# Altium PCB Double PCB.PcbDoc
Units mm, origin at the board's own origin, x right, y up, seen from the top; angles counter-clockwise.
Board outline 77.98 x 79.63 mm, 2 copper layers (Top Layer, Bottom Layer); 17 components, 18 nets, 87 pads, 35 vias.
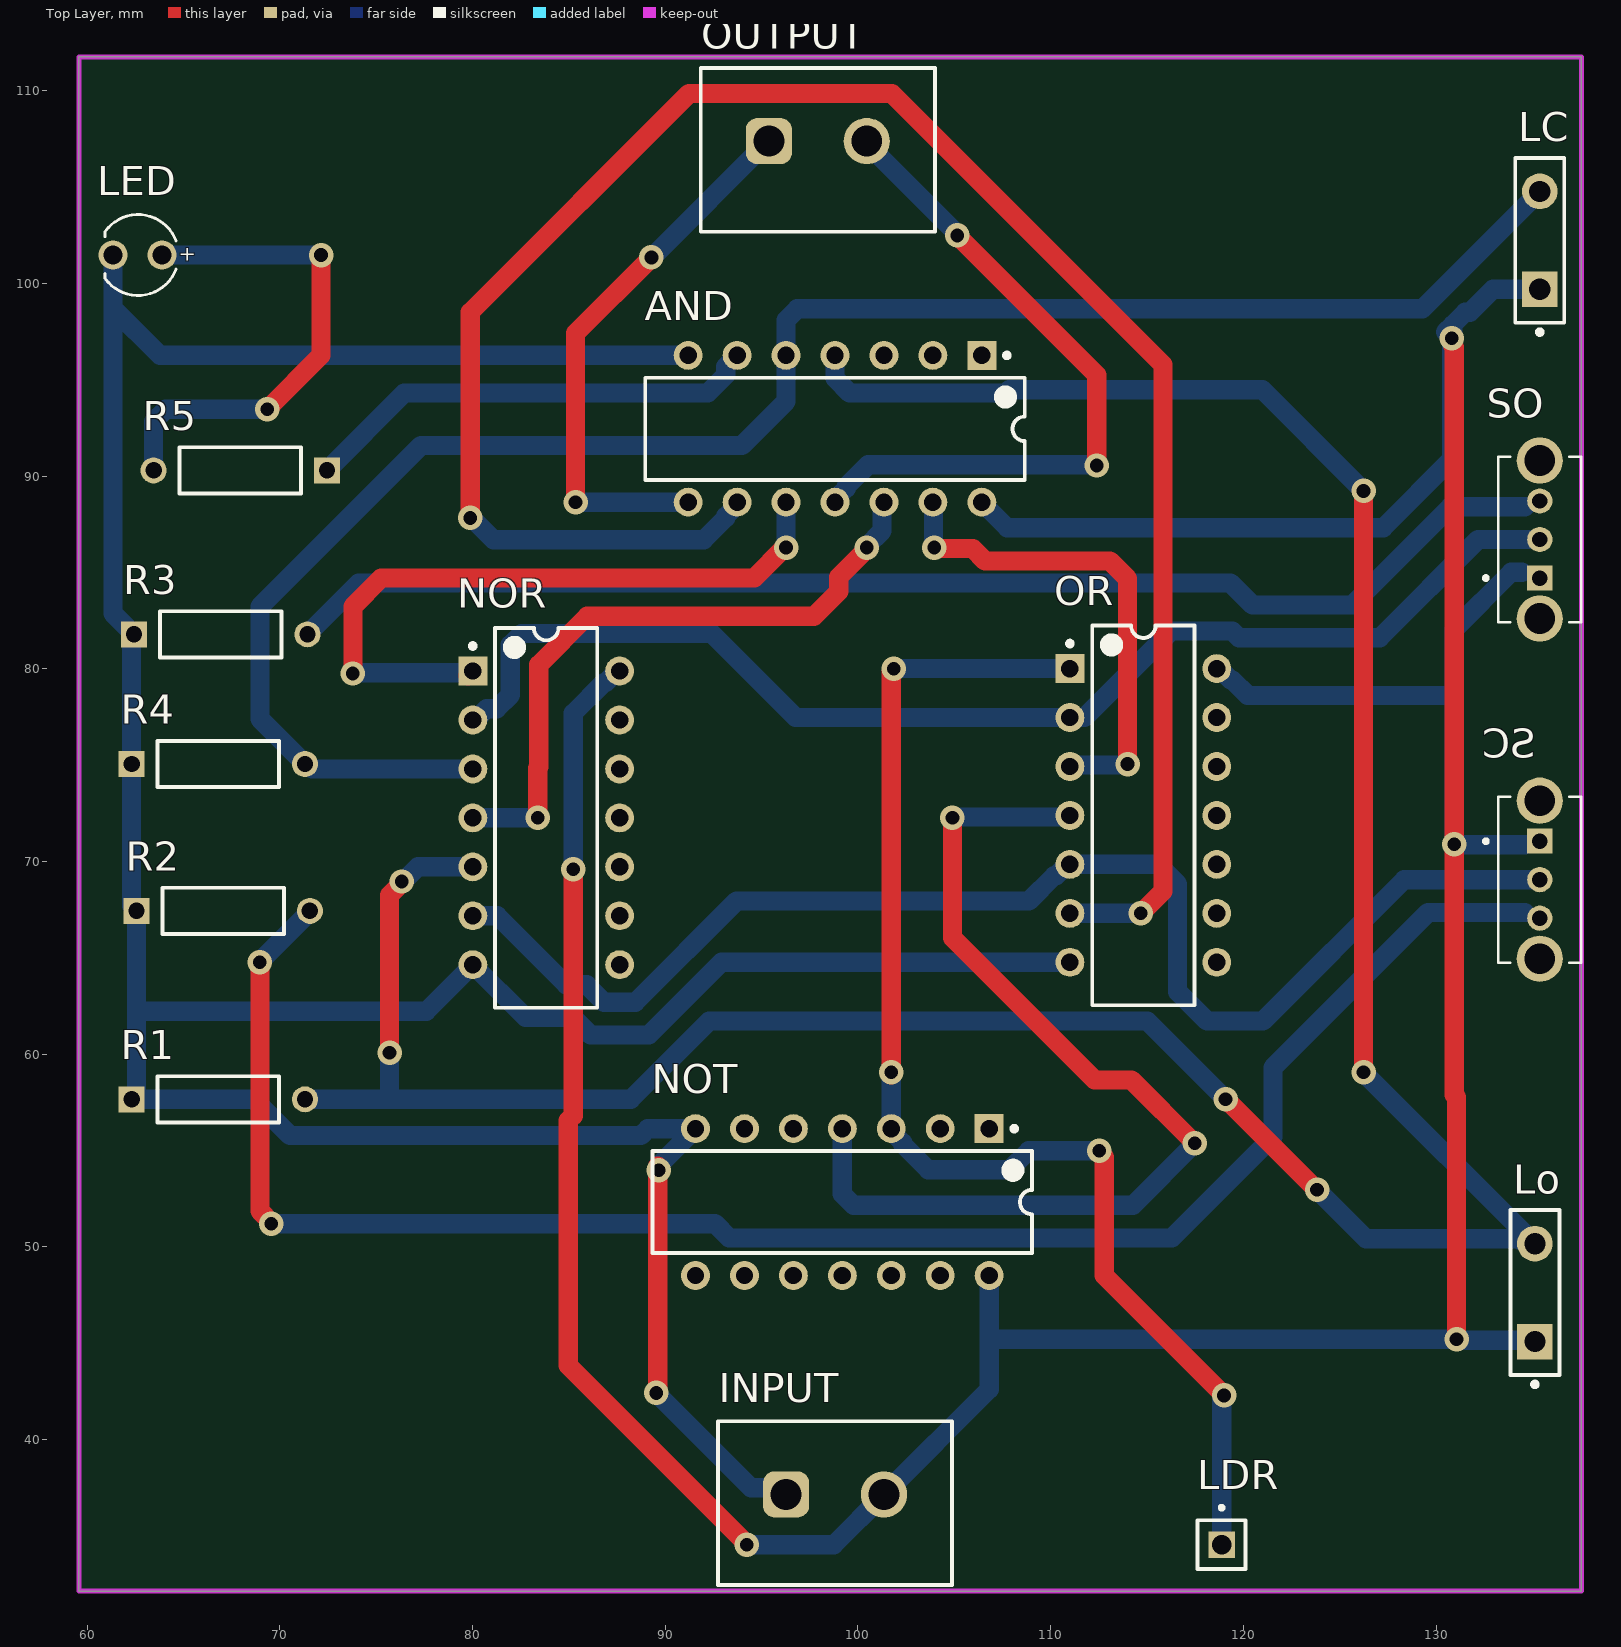
[diagram p0: Top Layer view]
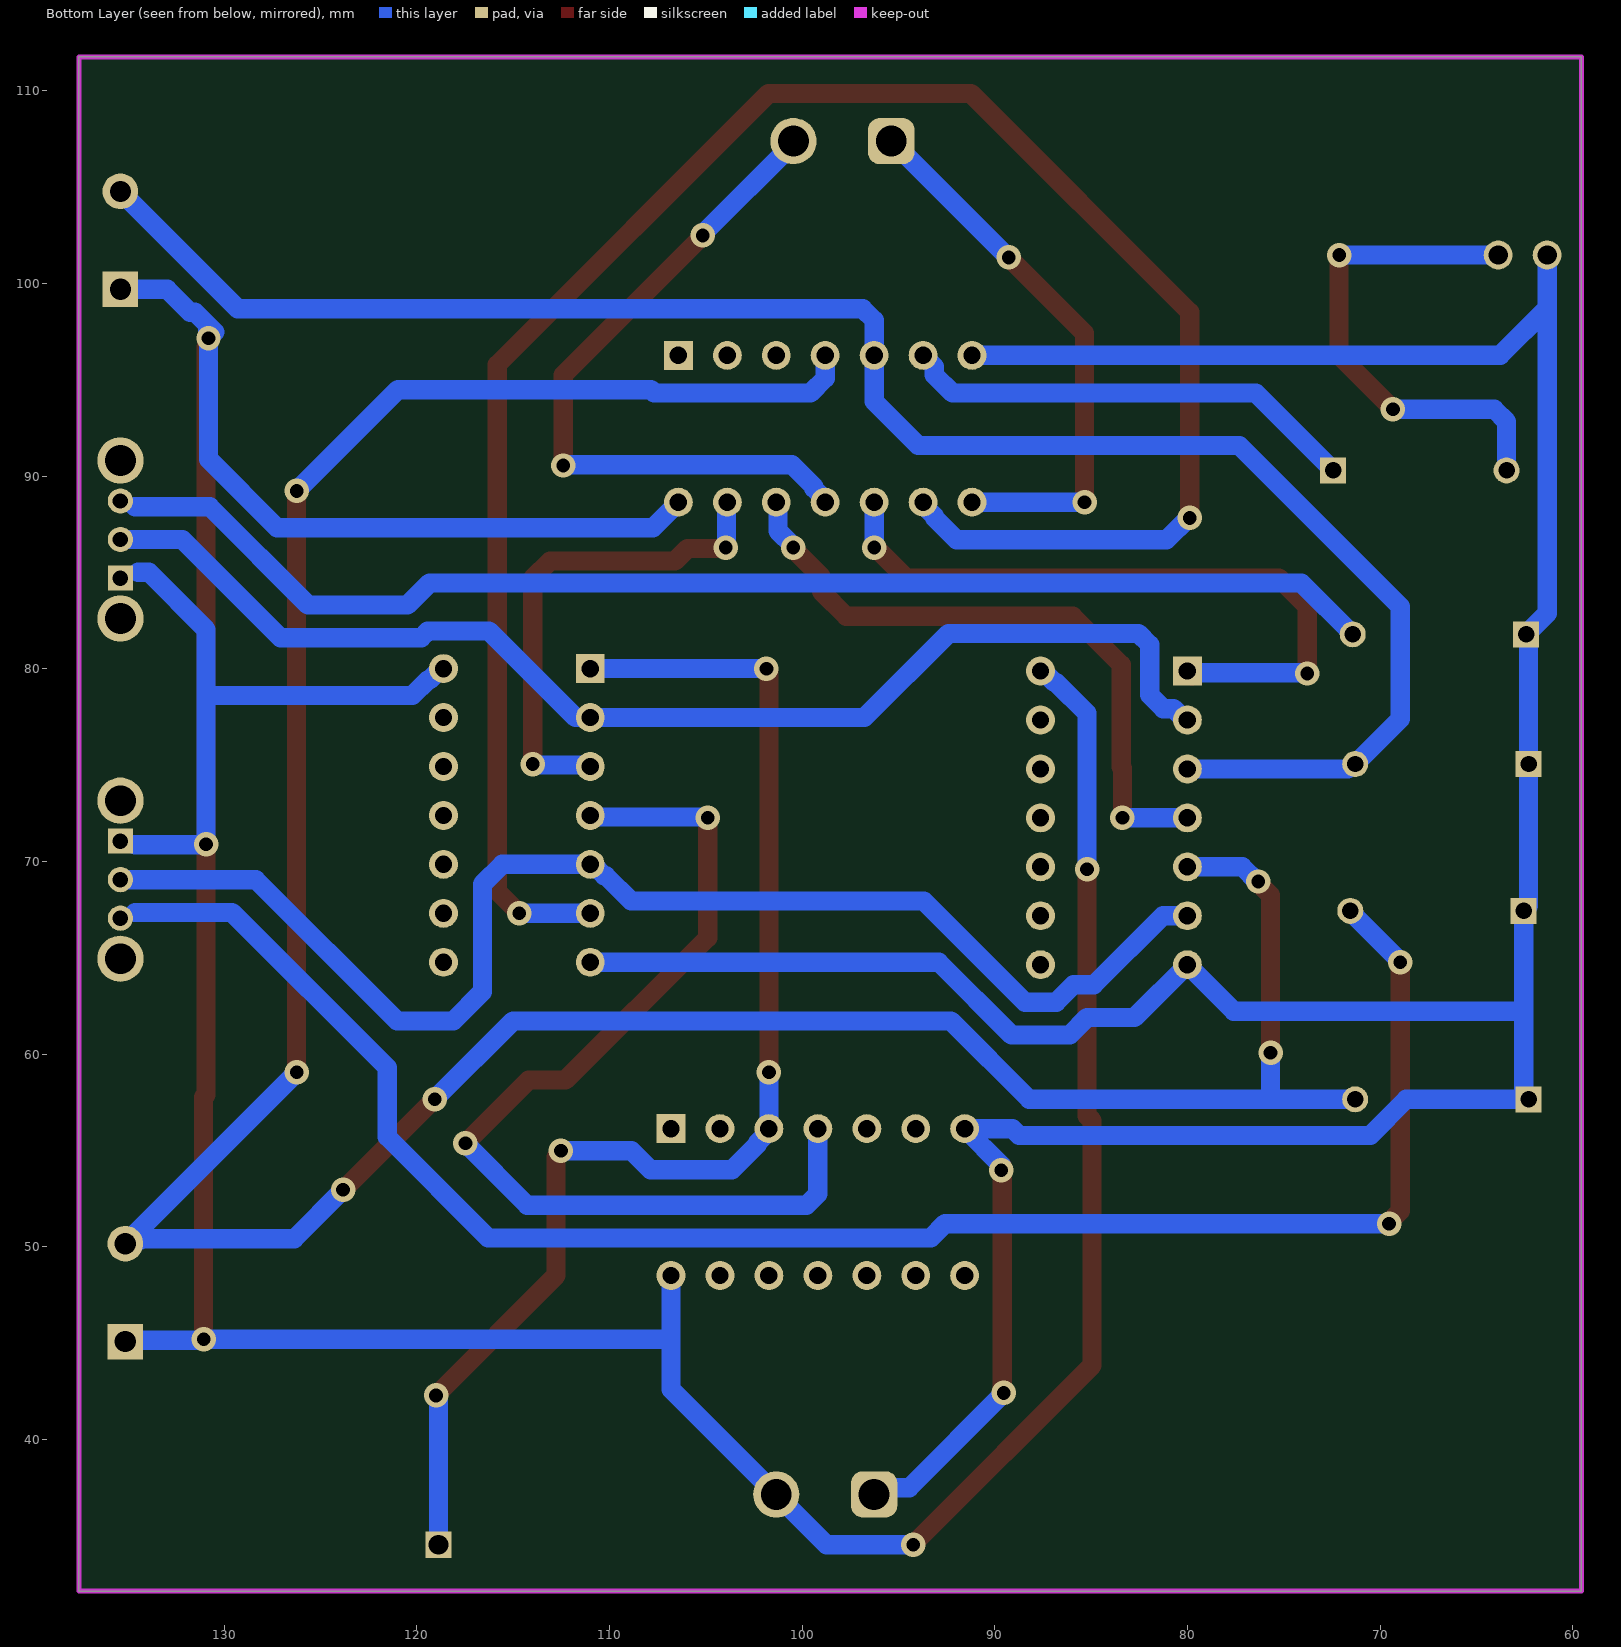
[diagram p1: Bottom Layer view, seen from below]

## Layer stack, top to bottom
Top Solder: solder mask 0.0102, Solder Resist, Dk 3.5
Top Layer: signal copper 0.0356
Dielectric 1: dielectric 0.32, FR-4, Dk 4.8
Bottom Layer: signal copper 0.0356
Bottom Solder: solder mask 0.0102, Solder Resist, Dk 3.5

## Board outline
59.563,32.131 59.563,111.76 137.541,111.76 137.541,32.131

## Design rules (kind name [scope] priority, off if disabled: settings)
Clearance [All] p1: gap=0.7 ignorepadtopadclearanceinfootprint=FALSE
PolygonConnect [All] p1: connectstyle=Relief reliefconductorwidth=0.254 reliefentries=4 polygonreliefangle="90 Angle" airgapwidth=0.254
RoomDefinition Sheet2 [InComponentClass('Sheet2')] p1: confinementstyle=ConfineIn formatcopy=TRUE lockcomponents=FALSE outline 0,0 50.8,0 50.8,25.4 0,25.4
RoutingVias [All] p1: holewidth=0.711 width=1.27 viastyle="Through Hole" minholewidth=0.711 minwidth=1.27 maxholewidth=0.711 maxwidth=1.27
SolderMaskExpansion [All] p1: expansion=0.102 istentingtop=FALSE
Width [All] p1: maxlimit=1 minlimit=0.254 preferedwidth=1
30 further rules are at their usual default settings.

## Components (designator, comment, footprint, x,y, rotation, side; value= is the part's Value field where it differs from the comment)
AND "SN74LS08N" N0014A 98.806,92.456 r270 top
INPUT "" 691311500102 98.806,36.703 r0 top
LC "SW-PB" SPST-2 135.382,102.235 r90 top
LDR "" SAMTEC_HTSW-101-06-T-S 118.872,34.544 r90 top
LED "151031YS05900" WL-TMRC_D3.95H5.3 -1207.389,-1168.527 r180 top
Lo "SW-PB" SPST-2 135.128,47.625 r90 top
NOR "" N0014A 83.82,72.263 r0 top
NOT "SN7404N" N0014A 99.187,52.324 r270 top
OR "" N0014A 114.808,72.39 r0 top
OUTPUT "691311500102" 691311500102 97.917,106.934 r0 top
R1 "" RESA60-630X240 66.802,57.658 r0 top
R2 "" RESA60-630X240 67.056,67.437 r0 top
R3 "" RESA60-630X240 66.929,81.788 r0 top
R4 "" RESA60-630X240 66.802,75.057 r0 top
R5 "MFR-25FBF52-47R5" RESA60-630X240 67.945,90.297 r180 top
SC "EG1247" SW_EG1247 135.382,69.056 r270 top
SO "EG1247" SW_EG1247 135.382,86.709 r90 top

## Footprints (in the part's own frame and the unit in brackets; to place one, negate y for a bottom-side part, rotate by r counter-clockwise, add the part's x,y. Pads: shape width x height; smd on the part's side, far side on the other; paste and mask are expansions set on the pad)
691311500102 [mm] "5,08mm - PCB Headers - Vertical - Closed ends -02p"
  rrect50% 2.4x2.4 hole 1.6: 1(-2.54,0.45)
  round 2.4 hole 1.6: 2(2.54,0.45)
  silkscreen extent -6.08,-4.25 6.08,4.25, body extent -6.08,-4.25 6.08,4.25, height 12.05
N0014A [mm] "DIP, 14-Leads, Body 19.7x6.6mm, Pitch 2.54mm"
  rect 1.5x1.5 hole 0.9: 1(-3.81,7.62)
  round 1.5 hole 0.9: 2(-3.81,5.08) 3(-3.81,2.54) 4(-3.81,0) 5(-3.81,-2.54) 6(-3.81,-5.08) 7(-3.81,-7.62) 8(3.81,-7.62) 9(3.81,-5.08) 10(3.81,-2.54) 11(3.81,0) 12(3.81,2.54) 13(3.81,5.08) 14(3.81,7.62)
  silkscreen extent -3.93,-9.85 2.65,9.85, body extent -3.95,-9.85 3.95,9.85, height 5.08
RESA60-630X240 [mm] "Axial Resistor, 2-Leads, Dia 2.4mm, Body Length 6.3mm"
  rect 1.35x1.35 hole 0.85: 1(-4.5,0)
  round 1.35 hole 0.85: 2(4.5,0)
  silkscreen extent -3.15,-1.2 3.15,1.2, body extent -3.15,-1.2 3.15,1.2, height 2.4
SAMTEC_HTSW-101-06-T-S [mm]
  rect 1.37x1.37 / inner round 1.37 / far side rect 1.37x1.37 hole 1.02: 01(0,0)
  silkscreen extent -1.27,-1.24 2.02,1.24
SPST-2 [mm] "Switch; 2 Leads"
  rect 1.85x1.85 hole 1.1: 1(-2.54,0)
  round 1.85 hole 1.1: 2(2.54,0)
  silkscreen extent -4.89,-1.27 4.28,1.27
SW_EG1247 [mm]
  rect 1.308x1.308 / inner round 1.308 / far side rect 1.308x1.308 hole 0.8: 1(-2,0)
  round 1.308 hole 0.8: 2(0,0) 3(2,0)
  round 2.4 hole 1.6: SH1(-4.1,0) SH2(4.1,0)
  silkscreen extent -4.3,-2.9 4.3,2.15, body extent -4.3,-2.15 4.3,6.15, height 2.8
WL-TMRC_D3.95H5.3 [mm] "THT Mono-color Round Color LED, 2-leads"
  round 1.5 hole 1: 1(-1271.27,-1270) 2(-1268.73,-1270)
  silkscreen extent -1272,-1272.1 -1268.31,-1267.9, body extent -1271.99,-1271.97 -1268.37,-1268.03, height 5.35

## Part data
AND: library part CMP-0777-00259-3, "Quadruple 2-Input Positive-AND Gates, N0014A, TUBE", F @ Nom Voltage(Max)(Mhz)=35, Generic Part Number=SN74LS08, ICC @ Nom Voltage(Max)(mA)=0.021, Manufacturer="Texas Instruments", Operating Temperature Range(C)="0 to 70", Rating=Catalog, tpd @ Nom Voltage(Max)(ns)=25, Voltage(Nom)(V)=5, Bits(#)=4, DatasheetVersion=SDLS033, Input Type=TTL, Output Drive (IOL/IOH)(Max)(mA)=-0.8/16, Output Type=TTL, PackageReference=N0014A, Schmitt Trigger=No, Technology Family=LS, VCC(Max)(V)=5.25, VCC(Min)(V)=4.75
INPUT OUTPUT: library part CMP-1502-02146-2, Color=Green, Current=20A, Max Operating Temperature=105°C, Min Operating Temperature=-40°C, Voltage=300V, Contact Material=Brass, Contact Plating=Tin, Current Rating=20A, Gender=Male, Height=12mm, Lead Pitch=5.08mm, Length=8.5mm, Mount="Through Hole", NexarPartId=8917747, Number of Contacts=2, Number of Levels=1, Number of Pins=2, Number of Positions Per Level=2, Number of Rows=1, Orientation=Vertical, Packaging=Box, Pitch=5.08mm, REACH SVHC=Unknown, RoHS=Compliant, Termination=Solder, Voltage Rating=300V, Width=11.5mm
LC Lo: "Switch", LatestRevisionDate=17-Jul-2002, LatestRevisionNote="Re-released for DXP Platform.", PackageDescription="Switch; 2 Leads", PackageReference=SPST-2, Published=24-Mar-1999, Publisher="Altium Limited"
LDR: library part HTSW-101-06-T-S, Package=None, Availability=Unavailable, MP=HTSW-101-06-T-S, Price=None
LED: library part CMP-1488-00003-2, Case/Package=Radial, Color=Yellow, Forward Current=100mA, Forward Voltage=2.1V, Max Operating Temperature=85°C, Max Reverse Voltage (DC)=5V, Min Operating Temperature=-40°C, Test Current=20mA, Dominant Wavelength=590nm, Height=5.3mm, Length=3mm, Lens Size=3mm, Lens Style="Circular, Diffused, Round", Luminous Intensity=30mcd, Mount="Through Hole", NexarPartId=29717806, Packaging=Bulk, Peak Wavelength=585nm, REACH SVHC=Unknown, RoHS=Compliant, Viewing Angle=60°, Wavelength=585nm, Width=3mm
NOR: library part CMP-0806-00203-3, "Quad 2-input Positive-NOR gates, N0014A, TUBE", F @ Nom Voltage(Max)(Mhz)=75, Generic Part Number=SN7402, ICC @ Nom Voltage(Max)(mA)=0.027, Manufacturer="Texas Instruments", Operating Temperature Range(C)="0 to 70", Rating=Catalog, tpd @ Nom Voltage(Max)(ns)=22, Voltage(Nom)(V)=5, Bits(#)=4, Code_JEDEC=MS-001, DatasheetVersion=SDLS027, Input Type=TTL, Output Drive (IOL/IOH)(Max)(mA)=0.8/-16, Output Type=TTL, PackageReference=N0014A, PackageVersion=http://www.ti.com/lit/ml/mpdi002c/mpdi002c.pdf, VCC(Max)(V)=5.25, VCC(Min)(V)=4.75
NOT: library part CMP-1615-00872-2, "Hex inverters, N0014A, TUBE", F @ Nom Voltage(Max)(Mhz)=35, Generic Part Number=SN7404, ICC @ Nom Voltage(Max)(mA)=0.033, Manufacturer="Texas Instruments", Operating Temperature Range(C)="0 to 70", Rating=Catalog, tpd @ Nom Voltage(Max)(ns)=22, Voltage(Nom)(V)=5, Bits(#)=6, Code_JEDEC=MS-001, DatasheetVersion=SDLS029C, Input Type=TTL, Output Drive (IOL/IOH)(Max)(mA)=-0.4/16, Output Type=CMOS, PackageReference=N0014A, Schmitt Trigger=No, Technology Family=TTL, VCC(Max)(V)=5.25, VCC(Min)(V)=4.75
OR: library part CMP-1573-00140-3, "Quad 2-input positive-OR gates, N0014A, TUBE", F @ Nom Voltage(Max)(Mhz)=100, Generic Part Number=SN7432, ICC @ Nom Voltage(Max)(mA)=0.038, Manufacturer="Texas Instruments", Operating Temperature Range(C)="0 to 70", Rating=Catalog, tpd @ Nom Voltage(Max)(ns)=22, Voltage(Nom)(V)=5, Bits(#)=4, Code_JEDEC=MS-001, DatasheetVersion=SDLS100, Input Type=TTL, Output Drive (IOL/IOH)(Max)(mA)=0.8/-16, Output Type=TTL, PackageReference=N0014A, PackageVersion=http://www.ti.com/lit/ml/mpdi002c/mpdi002c.pdf, VCC(Max)(V)=5.25, VCC(Min)(V)=4.75
R1 R2 R3 R4 R5: library part CMP-1659-00067-1, "Axial Resistor, 47.5 Ohm, +/- 1%, 0.25 W, -55 to 155 degC, 2-Pin THD, RoHS, Bulk", Case\Package=SOIC, Max Operating Temperature="85 degC", Max Supply Voltage="5 V", Min Operating Temperature="-40 degC", Min Supply Voltage="3 V", Nominal Supply Current="170 uA", Nominal Voltage Gain="100 dB", Output Current="160 mA", Package Quantity=2500, Bandwidth="1 MHz", Channels=4, Common Mode Rejection Ratio="50 dB", ComponentLink1Description="Manufacturer URL", ComponentLink1URL=http://www.yageo.com/, ComponentLink2Description=Datasheet, ComponentLink2URL=http://www.yageo.com/documents/recent/Yageo%20LR_MFR_2013.pdf, DatasheetVersion=Apr-13, Height="1.58 mm", Length="8.65 mm", Mount="Surface Mount", Nominal Gain Bandwith Product="1 MHz", PackageDescription="2-Pin Axial Lead, Dia 2.4 mm, Body Length 6.3 mm", PackageReference=MFR-25, Packaging="Tape and Reel", Pins=14, Radiation Hardening=No, REACH SVHC="No SVHC", RoHSCompliant=true, Slew Rate="1 V\us", Unity Gain Bandwidth Product="1 MHz", Width="3.91 mm"
SC SO: "Slide Switch SPDT Through Hole, Right Angle", Package=None, Availability="In Stock", Check_prices=https://www.snapeda.com/parts/EG1247/E-Switch/view-part/?ref=eda, MF=E-Switch, MP=EG1247, Price=None, Purchase-URL=https://pricing.snapeda.com/search/part/EG1247/?ref=eda, SnapEDA_Link=https://www.snapeda.com/parts/EG1247/E-Switch/view-part/?ref=snap

## Via types
v1: diameter 1.27, hole 0.711, Top Layer to Bottom Layer, 35 vias

## Nets (pads, with @x,y where several pads share a name; then routed paths per layer and width w, separated by ;. In a path a pad name is that pad's centre, name@x,y a point inside that pad or via, vN(x,y) a via of type N, cw(c..) or ccw(c..) an arc to the next point about the centre after c; other vN are vias at no path point)
GND: AND.7 INPUT.1 LED.2 NOR.7 NOT.7 OR.7 R1.1 R2.1 R3.1 R4.1 | length 181.8
  Top Layer w1: R1.1 R1.1@62.429,57.785 ; R4.1@62.31,75.065 R4.1 R4.1@62.38,74.979 ; v1@89.611,42.374 v1@89.611,54.178
  Bottom Layer w1: LED.2 61.341,98.704 ; v1(89.535,42.418) 94.448,37.505 95.914,37.505 INPUT.1 ; v1@89.662,54.229 NOT.7 89.091,56.134 88.74,55.783 70.525,55.783 68.65,57.658 R1.1 62.556,57.912 62.556,62.539 ; AND.7 63.779,96.266 61.341,98.704 ; OR.7 92.919,64.77 89.142,60.993 86.118,60.993 85.213,61.898 82.755,61.898 NOR.7 77.597,62.23 62.865,62.23 62.556,62.539 ; 61.341,98.704 61.341,82.876 62.302,81.915 R4.1 62.302,67.691 R2.1 62.556,62.539
  other v1: 89.662,53.975
NetAND_4: AND.4 Lo.2 NOR.5 R1.2 | length 159.7
  Top Layer w1: R1.2 R1.2@71.302,57.753 ; v1(75.692,60.071) 75.692,68.253 76.327,68.888 v1(76.327,68.961) ; v1(119.075,57.658) 119.101,57.658 123.8,52.959 v1(123.825,52.959) ; v1(126.238,59.055) v1(126.238,89.23)
  Bottom Layer w1: R1.2 75.692,57.658 ; v1(75.692,60.071) 75.692,57.658 ; v1(76.327,68.961) 76.4,68.961 77.162,69.723 NOR.5 ; AND.4 98.806,95.074 99.564,94.316 107.673,94.316 107.845,94.488 120.98,94.488 v1(126.238,89.23) ; v1(119.075,57.658) 115.011,61.722 92.275,61.722 88.211,57.658 75.692,57.658 ; v1(123.825,52.959) 126.365,50.419 134.273,50.419 134.364,50.328 Lo.2@134.965,50.328 ; v1(126.238,59.055) Lo.2@134.965,50.328 ; Lo.2 Lo.2@134.965,50.328
NetAND_5: AND.5 LC.2 NOR.3 R4.2 | length 95.3
  Bottom Layer w1: R4.2 68.961,77.398 68.961,83.236 77.318,91.592 93.98,91.592 96.266,93.878 96.266,98.093 96.852,98.679 129.286,98.679 LC.2 ; R4.2@71.683,74.803 NOR.3
NetAND_6: AND.6 R5.1 | length 24
  Bottom Layer w1: R5.1 76.458,94.31 92.202,94.31 93.142,95.25 93.142,95.682 AND.6
NetAND_8: AND.8 OUTPUT.1 | length 28.9
  Top Layer w1: v1(85.344,88.646) 85.344,97.409 v1(89.281,101.346) ; AND.8@91.051,88.646 AND.8
  Bottom Layer w1: v1(85.344,88.646) AND.8 ; v1(89.281,101.346) 89.31,101.346 95.348,107.384 OUTPUT.1
NetAND_9: AND.9 OR.6 | length 105.3
  Top Layer w1: v1(79.883,87.829) 79.883,98.501 91.237,109.855 101.752,109.855 115.824,95.783 115.824,68.453 v1(114.681,67.31) ; AND.9@93.643,88.563 AND.9 ; OR.6 OR.6@111.133,67.31
  Bottom Layer w1: v1(79.883,87.829) 79.956,87.829 81.089,86.696 91.994,86.696 93.136,87.838 93.136,87.921 93.726,88.511 AND.9 ; OR.6 v1(114.681,67.31)
NetAND_10: AND.10 NOR.1 | length 36.2
  Top Layer w1: v1(73.787,79.756) 73.787,83.234 75.262,84.709 94.612,84.709 96.193,86.29 v1(96.266,86.29) ; NOR.1@79.76,79.633 NOR.1
  Bottom Layer w1: v1(73.787,79.756) 73.824,79.793 79.92,79.793 NOR.1 ; v1(96.266,86.29) AND.10
NetAND_11: AND.11 OUTPUT.2 | length 36.5
  Top Layer w1: AND.11 AND.11@98.889,88.729 ; v1@105.244,102.577 105.244,102.401 112.395,95.25 v1(112.395,90.551)
  Bottom Layer w1: AND.11 98.806,88.781 99.396,89.371 99.396,89.454 100.538,90.596 112.35,90.596 v1(112.395,90.551) ; OUTPUT.2 100.457,107.261 105.156,102.562 v1(105.156,102.489)
NetAND_12: AND.12 NOR.4 | length 34.2
  Top Layer w1: NOR.4 NOR.4@80.145,72.263 ; v1(83.382,72.263) 83.382,74.841 83.439,74.898 83.439,80.213 85.954,82.728 97.714,82.728 99.003,84.017 99.003,84.763 100.457,86.217 v1(100.457,86.29)
  Bottom Layer w1: NOR.4 v1(83.382,72.263) ; v1(100.457,86.29) 100.457,86.363 101.25,87.156 101.25,88.55 AND.12
NetAND_13: AND.13 OR.3 | length 25.9
  Top Layer w1: v1(103.961,86.29) 104.013,86.238 105.956,86.238 106.596,85.598 113.079,85.598 113.989,84.688 v1(113.989,75.057) ; OR.3 OR.3@111.133,74.93
  Bottom Layer w1: AND.13 103.924,88.608 103.924,86.328 v1(103.961,86.29) ; OR.3 111.073,75.005 113.937,75.005 v1(113.989,75.057)
NetAND_14: AND.14 INPUT.2 LC.1 Lo.1 NOR.14 NOT.14 OR.14 SC.1 SO.1 | length 225.1
  Top Layer w1: v1(85.217,69.596) 85.217,56.809 84.963,56.555 84.963,43.84 v1@94.132,34.671 ; NOR.14@87.495,79.883 NOR.14 ; v1(130.81,97.155) 130.862,97.103 130.862,96.776 130.937,96.701 v1(130.937,70.891) 130.937,57.899 131.064,57.772 v1(131.064,45.212) ; LC.1@134.957,99.27 LC.1
  Bottom Layer w1: v1(85.217,69.596) 85.217,77.688 86.822,79.293 86.905,79.293 87.495,79.883 NOR.14 ; v1(94.234,34.544) 98.737,34.544 INPUT.2 106.807,42.614 106.807,45.212 ; AND.14 107.747,87.325 127.254,87.325 130.81,90.881 v1(130.81,97.155) ; NOT.14 106.807,45.212 ; OR.14 118.753,80.01 119.343,79.42 119.426,79.42 120.233,78.613 130.859,78.613 130.937,78.691 ; v1@130.488,97.477 130.862,97.85 ; v1@130.722,97.243 v1(130.81,97.155) ; 134.46,85.009 133.904,85.009 130.937,82.042 130.937,78.691 ; 134.62,70.866 130.962,70.866 v1(130.937,70.891) 130.937,78.691 ; Lo.1 135.053,45.16 131.116,45.16 v1(131.064,45.212) 106.807,45.212 ; LC.1 132.957,99.695 131.765,98.503 131.514,98.503 130.862,97.85 ; v1(130.81,97.155) 130.862,97.207 130.862,97.85
NetLDR_01: LDR.01 NOT.3 OR.1 | length 68.5
  Top Layer w1: v1@101.727,58.928 v1(101.727,59.055) 101.727,79.81 101.854,79.937 v1(101.854,80.01) ; v1(112.522,54.991) 112.522,54.918 112.776,54.664 112.776,48.514 118.911,42.379 v1@118.911,42.353
  Bottom Layer w1: v1(101.727,59.055) 101.727,55.999 102.317,55.409 102.317,55.326 103.644,53.999 107.869,53.999 108.861,54.991 v1(112.522,54.991) ; v1(101.854,80.01) OR.1 ; LDR.01 118.872,42.091 118.999,42.218 v1(118.999,42.291)
NetLED_1: LED.1 R5.2 | length 26.3
  Top Layer w1: R5.2 R5.2@63.445,90.392 ; LED.1 LED.1@64.016,101.473 ; v1(69.342,93.472) 72.136,96.266 v1(72.136,101.473)
  Bottom Layer w1: R5.2 63.445,92.836 64.081,93.472 v1(69.342,93.472) ; LED.1 v1(72.136,101.473)
NetNOR_2: NOR.2 OR.2 SO.2 | length 64.7
  Bottom Layer w1: NOR.2 80.145,77.343 80.735,77.933 81.257,77.933 81.96,78.636 81.96,81.247 82.546,81.833 92.411,81.833 96.774,77.47 OR.2 111.76,77.47 116.25,81.96 119.426,81.96 119.774,81.612 127.078,81.612 132.175,86.709 SO.2
NetNOR_6: NOR.6 OR.5 SC.2 | length 69.9
  Bottom Layer w1: NOR.6 81.28,67.183 84.865,63.598 85.917,63.598 86.822,62.693 88.438,62.693 93.69,67.945 108.875,67.945 110.19,69.26 110.273,69.26 110.863,69.85 115.57,69.85 116.586,68.834 116.586,63.246 118.11,61.722 121.02,61.722 128.354,69.056 SC.2
NetNOT_4: NOT.4 OR.4 | length 52.6
  Top Layer w1: v1(104.902,72.263) 104.902,66.04 112.283,58.659 114.188,58.659 v1(117.475,55.372)
  Bottom Layer w1: NOT.4 99.187,52.75 99.773,52.164 114.267,52.164 v1(117.475,55.372) ; v1(104.902,72.263) 104.954,72.315 110.923,72.315 OR.4
NetR2_2: R2.2 SC.3 | length 91.9
  Top Layer w1: v1@68.961,64.643 68.961,51.864 69.545,51.279 v1(69.545,51.206)
  Bottom Layer w1: v1(68.961,64.77) 68.961,64.806 71.556,67.401 R2.2 ; v1(69.545,51.206) 92.582,51.206 93.325,50.464 116.288,50.464 121.539,55.715 121.539,59.309 129.586,67.356 134.62,67.356
NetR3_2: R3.2 SO.3 | length 66.9
  Bottom Layer w1: R3.2 74.096,84.455 119.335,84.455 120.478,83.312 125.645,83.312 130.742,88.409 134.62,88.409
pads on no net: AND.1 AND.2 AND.3 NOR.8 NOR.9 NOR.10 NOR.11 NOR.12 NOR.13 NOT.1 NOT.2 NOT.5 NOT.6 NOT.8 NOT.9 NOT.10 NOT.11 NOT.12 NOT.13 OR.8 OR.9 OR.10 OR.11 OR.12 OR.13 SC.SH1 SC.SH2 SO.SH1 SO.SH2

## Keep-outs
Keep-Out Layer:
  the board outline again, w0.254

## Text inside footprints (layer, text, board x,y; h text height)
LED: Top Overlay "+" at 65.661,101.823 h0.8 r180